# EAGLE board CCR (EAGLE 7.1.0)
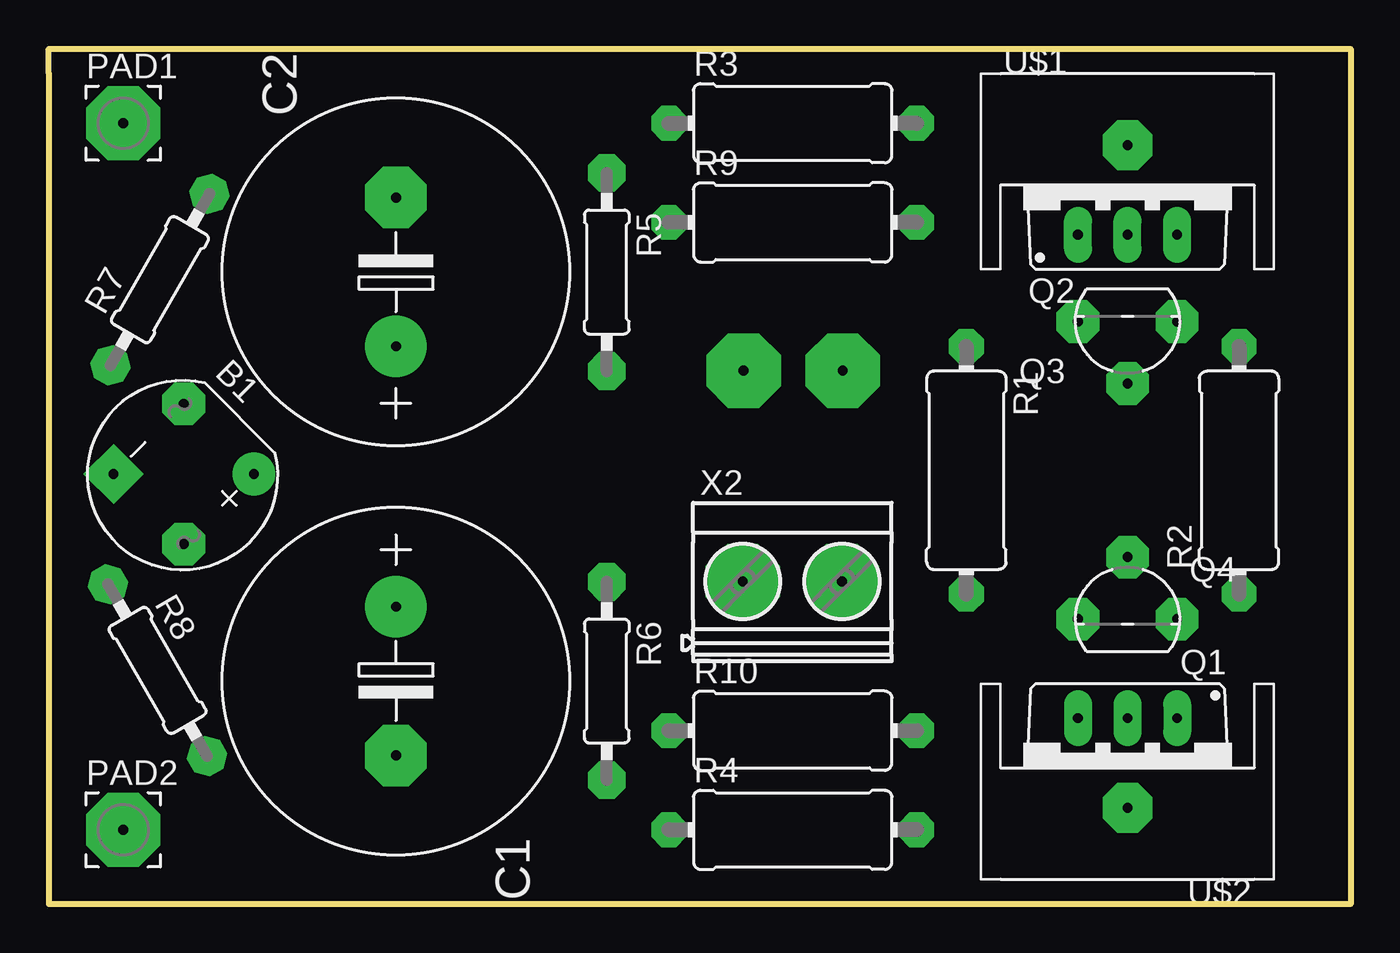
[diagram p0: board, top side]
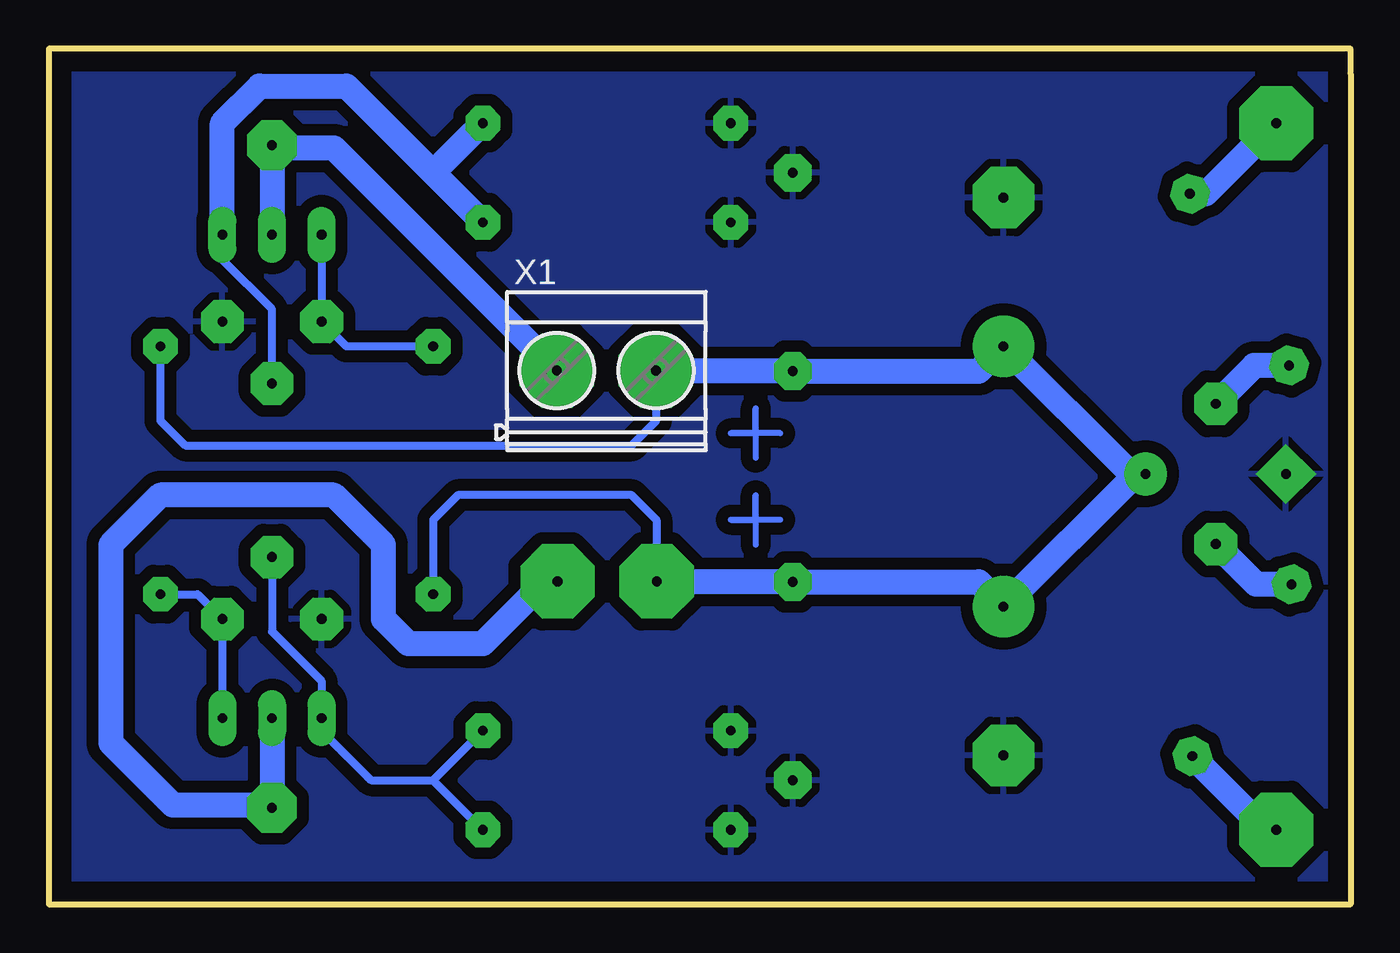
[diagram p1: board, bottom side, seen from below]

Size 66.68 x 43.81 mm. Coordinates in mm from the lower left corner, seen from the top.
Outline: 0,42.55 0,0 66.68,0 66.68,43.81 0,43.81 0,42.55
Copper layers (1*16): Top 0.035mm / dielectric 1.5mm / Bottom 0.035mm
Design rules "default *": minimum track width 16mil, minimum drill 24mil, track to track 8mil, track to pad 8mil, pad to pad 8mil, via to via 8mil, smd to smd 8mil, copper to edge 40mil, drill to drill 8mil, minimum pad ring 10mil, minimum via ring 8mil, stop-mask expansion 4mil, vias tented up to drill 0mil, thermal gap 16mil
Net classes: 0 default: clearance 0.205 mm

## Footprints (pad centres in the part's own frame; a part is rotated, then mirrored left to right if it is on the bottom)
RB1A = drill 0.5 pad 2.184: + -2.54,2.54 | drill 0.5 pad 2.184 square: - 2.54,-2.54 | drill 0.5 pad 2.184 octagon: AC1 2.54,2.54; AC2 -2.54,-2.54
E7,5-18 = drill 0.5 pad 3.15: + -3.81,0 | drill 0.5 pad 3.15 octagon: - 3.81,0
3,81/1,4 = drill 0.5 pad 3.81 octagon: 1 0,0
TO220BV = drill 0.5 pad 1.422 long: D 0,-2.54; G -2.54,-2.54; S 2.54,-2.54
SOT-92WIDE = drill 0.5 pad 2.184 octagon: B 0,2.54; C 2.54,-0.635; E -2.54,-0.635
0411/12 = drill 0.5 pad 1.778 octagon: 1 -6.35,0; 2 6.35,0
0207/10 = drill 0.5 pad 1.93 octagon: 1 -5.08,0; 2 5.08,0
SK95-3M3 = drill 0.5 pad 2.54 octagon: P$1 0,2.05
MKDSN1,5/2-5,08 = drill 0.5 pad 3.81 octagon: 1 -2.561,0.025; 2 2.519,0.025

## Placement (x,y rotation side)
B1  [RB1A]  6.91,22.04 225 top
C1  [E7,5-18]  17.78,11.43 270 top
C2  [E7,5-18]  17.78,32.38 90 top
PAD1  [3,81/1,4]  3.81,40.01 0 top
PAD2  [3,81/1,4]  3.81,3.81 0 top
Q1  BUZ11BV  [TO220BV]  55.25,6.98 180 top
Q2  BUZ11BV  [TO220BV]  55.25,36.83 0 top
Q3  KSP42TA  [SOT-92WIDE]  55.25,29.21 180 top
Q4  KSP42TA  [SOT-92WIDE]  55.25,15.24 0 top
R1  300k  [0411/12]  46.99,22.23 270 top
R2  300k  [0411/12]  60.96,22.23 90 top
R3  13R  [0411/12]  38.1,40.01 0 top
R4  13R  [0411/12]  38.1,3.81 0 top
R5  160k  [0207/10]  28.58,32.38 270 top
R6  160k  [0207/10]  28.58,11.43 270 top
R7  NTC  [0207/10]  5.69,31.99 60 top
R8  NTC  [0207/10]  5.57,11.98 300 top
R9  8R2  [0411/12]  38.1,34.92 0 top
R10  8R2  [0411/12]  38.1,8.89 0 top
U$1  SK95-3M3  [SK95-3M3]  55.25,36.83 0 top
U$2  SK95-3M3  [SK95-3M3]  55.25,6.98 180 top
X1  MKDSN1,5/2-5,08  [MKDSN1,5/2-5,08]  38.1,27.3 0 bottom
X2  MKDSN1,5/2-5,08  [MKDSN1,5/2-5,08]  38.1,16.51 0 top

## Library data of the parts
B1 = rectifier
C1 C2 R1-R10 = rcl
PAD1 PAD2 = wirepad
Q1 Q2 = transistor-power
Q3 Q4 = Namenlos
U$1 U$2 = heatsink
X1 X2 = con-phoenix-508

## Nets
GND: B1.- C1.- C2.- Q3.E Q4.E R3.1 R4.1 R5.1 R6.2 R9.1 R10.1
N$3: Q1.S Q4.B R4.2 R10.2
N$4: Q1.D U$2.P$1 X2.2
N$5: Q2.D U$1.P$1 X1.1
N$6: Q2.S Q3.B R3.2 R9.2
N$7: Q1.G Q4.C R2.1
N$8: Q2.G Q3.C R1.1
N$10: PAD1.1 R7.2
N$11: B1.AC1 R8.1
N$13: PAD2.1 R8.2
N$14: B1.AC2 R7.1
N$15: B1.+ C1.+ C2.+ R1.2 R2.2 R5.2 R6.1 X1.2 X2.1

## Tracks (layer width: path | path; a pad name or v marks a point on that pad's centre or on a via)
GND
  pour Bottom (isolate 0.61): 0,43.81 0,0 66.68,0 66.68,43.81
N$1
  Bottom 0.305: 29.21,19.69 31.75,19.69 30.48,19.69 30.48,20.95 30.48,18.41
N$2
  Bottom 0.305: 29.21,24.13 31.75,24.13 30.48,24.13 30.48,25.4 30.48,22.86
N$3
  Bottom 0.406: Q4.B 55.25,13.97 52.71,11.43 Q1.S 52.71,8.89 50.17,6.35 46.99,6.35 | 46.99,6.35 R10.2 | R4.2 46.99,6.35
N$4
  Bottom 0.406: 40.62,17.17 X2.2 41.25,16.54
  Bottom 1.27: Q1.D U$2.P$1 55.74,5.08 60.33,5.08 63.5,8.25 63.5,18.41 60.96,20.95 52.07,20.95 49.53,18.41 49.53,14.61 48.26,13.34 44.45,13.34 41.25,16.54
N$5
  Bottom 0.406: 55.1,38.73 U$1.P$1
  Bottom 1.27: U$1.P$1 Q2.D | X1.1 52.07,38.73 55.1,38.73
N$6
  Bottom 0.406: Q3.B 55.25,30.48 57.79,33.02 57.79,34.92
  Bottom 1.27: 46.99,37.47 R3.2 | 46.99,37.47 R9.2 | Q2.S 57.79,34.92 57.79,40.01 55.88,41.91 51.44,41.91 46.99,37.47
N$7
  Bottom 0.406: R2.1 59.06,15.88 Q4.C Q1.G
N$8
  Bottom 0.406: R1.1 51.44,28.57 Q3.C Q2.G
N$10
  Bottom 1.27: R7.2 7.42,36.39 PAD1.1
N$11
  Bottom 1.27: R8.1 4.84,16.38 B1.AC1
N$13
  Bottom 1.27: PAD2.1 4.34,3.81 R8.2
N$14
  Bottom 1.27: R7.1 4.95,27.59 B1.AC2
N$15
  Bottom 0.406: 10.98,22.04 11.24,22.04 | 35.51,16.51 X2.1 35.56,17.19 35.56,19.69 36.83,20.95 45.72,20.95 46.99,19.69 R1.2 | 35.56,27.3 X1.2 35.58,24.74 36.83,23.5 59.69,23.5 60.96,24.77 R2.2
  Bottom 1.27: B1.+ 10.98,22.04 C1.+ 19.05,16.51 R6.1 35.51,16.51 | 11.24,22.04 C2.+ 19.05,27.3 R5.2 35.56,27.3